# EAGLE board PCB (EAGLE 9.7.0)

Size 181.59 x 115.24 mm. Coordinates in mm from the lower left corner, seen from the top.
Outline: 1.27,0 181.59,0 180.32,115.24 0,115.24 1.27,0
Copper layers (1*16): Top / Bottom
Stack-up Default Layer Stack: Top User Defined 0.035mm / Dielectric-1 User Defined 1.5mm / Bottom User Defined 0.035mm
Design rules "default": minimum track width 6mil, minimum drill 0.35mm, track to track 6mil, track to pad 6mil, pad to pad 6mil, via to via 6mil, smd to smd 6mil, copper to edge 40mil, drill to drill 6mil, minimum pad ring 10mil, minimum via ring 8mil, stop-mask expansion 4mil, vias tented up to drill 0mil, thermal gap 10mil

## Footprints (pad centres in the part's own frame; a part is rotated, then mirrored left to right if it is on the bottom)
CAPRD550W60D1025H1250B = drill 0.8 pad 1.4: 1 -2.75,0; 2 2.75,0
DIOM5336X265N = smd 2.284 x 2.124: 1 -2.164,0; 2 2.164,0
HDRV5W99P0X254_1X5_1255X635X10 = drill 1.2 pad 1.8 square: 1 0,0 | drill 1.2 pad 1.8: 2 2.54,0; 3 5.08,0; 4 7.62,0; 5 10.16,0
HDRV20W63P0X254_1X20_5080X369X = drill 1.1 pad 1.65 square: 1 0,0 | drill 1.1 pad 1.65: 2 2.54,0; 3 5.08,0; 4 7.62,0; 5 10.16,0; 6 12.7,0; 7 15.24,0; 8 17.78,0; 9 20.32,0; 10 22.86,0; 11 25.4,0; 12 27.94,0; 13 30.48,0; 14 33.02,0; 15 35.56,0; 16 38.1,0; 17 40.64,0; 18 43.18,0; 19 45.72,0; 20 48.26,0
1X01 = drill 1.016 octagon: 1 0,0
RESAD724W46L381D178B = drill 0.66 pad 1.26: 1 -3.62,0; 2 3.62,0
PWP14_2P31X2P46-L = smd 1.168 x 0.305: 1 -2.87,1.95; 2 -2.87,1.3; 3 -2.87,0.65; 4 -2.87,0; 5 -2.87,-0.65; 6 -2.87,-1.3; 7 -2.87,-1.95; 8 2.87,-1.95; 9 2.87,-1.3; 10 2.87,-0.65; 11 2.87,0; 12 2.87,0.65; 13 2.87,1.3; 14 2.87,1.95 | smd 2.31 x 2.46: 15 0,0
N0016A = drill 0.9 pad 1.5 square: 1 -3.81,8.89 | drill 0.9 pad 1.5: 2 -3.81,6.35; 3 -3.81,3.81; 4 -3.81,1.27; 5 -3.81,-1.27; 6 -3.81,-3.81; 7 -3.81,-6.35; 8 -3.81,-8.89; 9 3.81,-8.89; 10 3.81,-6.35; 11 3.81,-3.81; 12 3.81,-1.27; 13 3.81,1.27; 14 3.81,3.81; 15 3.81,6.35; 16 3.81,8.89
P8 = drill 0.864 pad 1.372 square: 1 -7.62,7.62 | drill 0.864 pad 1.372: 2 -7.62,5.08; 3 -7.62,2.54; 4 -7.62,0; 5 0,0; 6 0,2.54; 7 0,5.08; 8 0,7.62
N16 = drill 0.787 pad 1.295 square: 1 -7.62,17.78 | drill 0.787 pad 1.295: 2 -7.62,15.24; 3 -7.62,12.7; 4 -7.62,10.16; 5 -7.62,7.62; 6 -7.62,5.08; 7 -7.62,2.54; 8 -7.62,0; 9 0,0; 10 0,2.54; 11 0,5.08; 12 0,7.62; 13 0,10.16; 14 0,12.7; 15 0,15.24; 16 0,17.78

## Placement (x,y rotation side)
C1  [CAPRD550W60D1025H1250B]  11.25,98.48 0 top
C2  [CAPRD550W60D1025H1250B]  105.54,100.33 0 top
C3  [CAPRD550W60D1025H1250B]  8.72,74.73 90 top
C4  [CAPRD550W60D1025H1250B]  39.37,72.39 0 top
C5  [CAPRD550W60D1025H1250B]  69.17,72.12 0 top
C6  [CAPRD550W60D1025H1250B]  171.07,73.14 90 top
C7  [CAPRD550W60D1025H1250B]  128.53,59.69 0 top
C8  [CAPRD550W60D1025H1250B]  128.53,40.64 0 top
C9  [CAPRD550W60D1025H1250B]  66.04,15.24 0 top
C10  [CAPRD550W60D1025H1250B]  64.77,36.83 0 top
D1  1SMB5920B  [DIOM5336X265N]  162.56,106.68 0 top
D2  1SMB5920B  [DIOM5336X265N]  162.96,111.76 0 top
D9  1SMB5920B  [DIOM5336X265N]  53.25,96.52 180 top
D10  1SMB5920B  [DIOM5336X265N]  53.34,87.63 180 top
D11  1SMB5920B  [DIOM5336X265N]  53.25,104.27 180 top
D12  1SMB5920B  [DIOM5336X265N]  53.34,110.92 180 top
D13  1SMB5920B  [DIOM5336X265N]  162.56,99.06 0 top
D14  1SMB5920B  [DIOM5336X265N]  162.56,91.44 0 top
J1  171856-0105  [HDRV5W99P0X254_1X5_1255X635X10]  22.24,104.14 0 top
J2  2-825433-0  [HDRV20W63P0X254_1X20_5080X369X]  150.86,75.63 270 top
J3  2-825433-0  [HDRV20W63P0X254_1X20_5080X369X]  157.94,27.94 90 top
JP1  PINHD-1X1  [1X01]  46.99,97.79 0 top
JP10  PINHD-1X1  [1X01]  46.99,105.41 0 top
JP12  PINHD-1X1  [1X01]  171.45,102.87 0 top
JP13  PINHD-1X1  [1X01]  46.99,93.98 0 top
JP14  PINHD-1X1  [1X01]  171.45,111.94 0 top
JP15  PINHD-1X1  [1X01]  171.45,96.52 0 top
JP17  PINHD-1X1  [1X01]  7.62,59.69 0 top
JP18  PINHD-1X1  [1X01]  158.75,81.28 0 top
JP20  PINHD-1X1  [1X01]  7.62,53.34 0 top
JP21  PINHD-1X1  [1X01]  8.89,38.1 0 top
JP22  PINHD-1X1  [1X01]  8.89,30.48 0 top
R1  [RESAD724W46L381D178B]  24.83,63.5 180 top
R2  [RESAD724W46L381D178B]  53.34,63.5 180 top
R76  120k  [RESAD724W46L381D178B]  60.96,97.79 0 top
R77  15k  [RESAD724W46L381D178B]  68.58,97.79 0 top
R79  120k  [RESAD724W46L381D178B]  60.96,105.41 0 top
R80  100k  [RESAD724W46L381D178B]  83.82,107.95 90 top
R81  15k  [RESAD724W46L381D178B]  76.2,110.49 0 top
R82  100k  [RESAD724W46L381D178B]  83.82,95.25 270 top
R83  15k  [RESAD724W46L381D178B]  76.2,92.71 0 top
R84  120k  [RESAD724W46L381D178B]  76.2,97.79 0 top
R85  120k  [RESAD724W46L381D178B]  76.2,105.41 0 top
R86  15k  [RESAD724W46L381D178B]  68.58,105.41 0 top
R90  120k  [RESAD724W46L381D178B]  153.43,104.19 0 top
R91  100k  [RESAD724W46L381D178B]  121.92,107.95 90 top
R92  15k  [RESAD724W46L381D178B]  132.08,111.76 0 top
R93  120k  [RESAD724W46L381D178B]  132.08,105.41 0 top
R94  15k  [RESAD724W46L381D178B]  143.51,104.19 0 top
R95  120k  [RESAD724W46L381D178B]  153.67,96.52 0 top
R96  100k  [RESAD724W46L381D178B]  123.19,92.71 270 top
R97  15k  [RESAD724W46L381D178B]  131.89,88.9 0 top
R98  120k  [RESAD724W46L381D178B]  132.08,96.52 0 top
R99  15k  [RESAD724W46L381D178B]  143.51,96.52 0 top
R100  15k  [RESAD724W46L381D178B]  111.76,73.66 0 top
R101  15k  [RESAD724W46L381D178B]  102.87,73.66 0 top
R102  [RESAD724W46L381D178B]  31.75,49.53 0 top
R103  [RESAD724W46L381D178B]  20.32,54.61 0 top
R104  [RESAD724W46L381D178B]  31.75,54.61 0 top
R105  [RESAD724W46L381D178B]  29.21,30.48 0 top
R106  [RESAD724W46L381D178B]  83.82,48.26 90 top
R107  [RESAD724W46L381D178B]  43.18,52.07 90 top
R108  [RESAD724W46L381D178B]  49.53,54.61 90 top
R109  [RESAD724W46L381D178B]  20.32,46.99 0 top
R110  [RESAD724W46L381D178B]  76.2,45.72 0 top
R111  [RESAD724W46L381D178B]  76.2,52.07 0 top
R112  [RESAD724W46L381D178B]  97.79,63.5 0 top
R113  [RESAD724W46L381D178B]  97.79,59.69 0 top
R114  [RESAD724W46L381D178B]  97.79,55.88 0 top
R115  [RESAD724W46L381D178B]  97.79,52.07 0 top
R116  [RESAD724W46L381D178B]  97.79,48.26 0 top
R117  [RESAD724W46L381D178B]  97.79,44.45 0 top
R118  [RESAD724W46L381D178B]  97.79,40.64 0 top
R119  [RESAD724W46L381D178B]  97.79,36.83 0 top
R120  [RESAD724W46L381D178B]  38.1,30.48 0 top
R121  [RESAD724W46L381D178B]  29.21,36.83 0 top
R122  [RESAD724W46L381D178B]  38.1,36.83 0 top
R123  [RESAD724W46L381D178B]  85.09,26.67 90 top
R124  [RESAD724W46L381D178B]  45.48,34.29 90 top
R125  [RESAD724W46L381D178B]  49.53,34.29 90 top
R126  [RESAD724W46L381D178B]  76.2,24.13 0 top
R127  [RESAD724W46L381D178B]  76.2,29.21 0 top
R128  [RESAD724W46L381D178B]  97.79,33.02 0 top
R129  [RESAD724W46L381D178B]  97.79,29.21 0 top
R130  [RESAD724W46L381D178B]  97.79,25.4 0 top
R131  [RESAD724W46L381D178B]  97.79,21.59 0 top
R132  [RESAD724W46L381D178B]  97.79,17.78 0 top
R133  [RESAD724W46L381D178B]  97.79,13.97 0 top
R134  [RESAD724W46L381D178B]  97.79,10.16 0 top
R135  [RESAD724W46L381D178B]  97.79,6.35 0 top
U1  TLV2474CPWPPWP14_2P31X2P46-L  [PWP14_2P31X2P46-L]  105.41,87.63 0 top
U2  CD4053BEN0016A  [N0016A]  83.82,72.39 0 top
U15  INA128PP8  [P8]  49.53,74.94 180 top
U17  TL071CPP8  [P8]  36.5,102.87 180 top
U19  TLV2474CPWPPWP14_2P31X2P46-L  [PWP14_2P31X2P46-L]  64.77,48.26 0 top
U20  TLV2474CPWPPWP14_2P31X2P46-L  [PWP14_2P31X2P46-L]  66.04,26.67 0 top
U21  CD74HC4051EN16  [N16]  117.17,40.64 0 top
U22  CD74HC4051EN16  [N16]  118.11,13.97 0 top
U23  INA128PP8  [P8]  21.06,81.28 180 top

## Library data of the parts
C1-C10 = Capacitor; CATEGORY: Capacitor
D1 D2 D9-D14 = Diode; CATEGORY: Diode; DESCRIPTION: DIODE ZENER 6.2V 3W SMB; MANUFACTURER: Diodes Incorporated; MPN: 1SMB5920B-13; SUB-CATEGORY: Zener; THERMALLOSS: 3W
J1 = pin5; DESCRIPTION: KK RPC .100 HEADER ASSEMBLY FRICTION LOCK SOLID BODY.; HEIGHT: 10.66mm; MANUFACTURER_NAME: Molex; MANUFACTURER_PART_NUMBER: 171856-0105; MOUSER_PART_NUMBER: 538-171856-0105; MOUSER_PRICE-STOCK: https://www.mouser.co.uk/ProductDetail/Molex/171856-0105?qs=EU6FO9ffTwd%2F6iYgCbhDyg%3D%3D
J2 J3 = pin20; DESCRIPTION: Headers & Wire Housings 20P HEADER 6.70mm 2.54mm CENTERLINE; HEIGHT: 9.7mm; MANUFACTURER_NAME: TE Connectivity; MANUFACTURER_PART_NUMBER: 2-825433-0; MOUSER_PART_NUMBER: 571-2-825433-0; MOUSER_PRICE-STOCK: https://www.mouser.co.uk/ProductDetail/TE-Connectivity/2-825433-0?qs=Yxch5oR%2FTsPyWO6AE6CpEQ%3D%3D
JP1 JP10 JP12-JP15 JP17 JP18 JP20-JP22 = Connector; CATEGORY: CONNECTOR; SUB-CATEGORY: PIN-HEADER
R1 R2 R76 R77 R79-R86 R90-R135 = Resistor; CATEGORY: Resistor; SUB-CATEGORY: Fixed
U1 U19 U20 = TLV2474CPWP; COPYRIGHT: Copyright (C) 2023 Ultra Librarian. All rights reserved.; MANUFACTURER_PART_NUMBER: TLV2474CPWP; MFR_NAME: Texas Instruments
U2 = cd4053; COPYRIGHT: Copyright (C) 2023 Ultra Librarian. All rights reserved.; MANUFACTURER_PART_NUMBER: CD4053BE; MFR_NAME: Texas Instruments; REFDES: RefDes; TYPE: TYPE
U15 U23 = INA128P; COPYRIGHT: Copyright (C) 2023 Ultra Librarian. All rights reserved.; MANUFACTURER_PART_NUMBER: INA128P; MFR_NAME: Texas Instruments
U17 = tl071; COPYRIGHT: Copyright (C) 2023 Ultra Librarian. All rights reserved.; MANUFACTURER_PART_NUMBER: TL071CP; MFR_NAME: Texas Instruments
U21 U22 = analogmux8_1; COPYRIGHT: Copyright (C) 2023 Ultra Librarian. All rights reserved.; MANUFACTURER_PART_NUMBER: CD74HC4051E; MFR_NAME: Texas Instruments

## Nets
ADC0: J3.11 U15.6
ADC1: J3.12 U19.14 U21.3
ADC2: J3.14
GND: C1.2 C2.2 C3.2 C4.2 C5.2 C6.2 C7.2 C8.2 C9.2 C10.2 D2.2 D10.2 D12.2 D14.2 J1.5 JP13.1 JP14.1 JP18.1 R81.2 R83.2 R84.2 R85.2 R92.2 R93.2 R97.2 R98.2 R101.2 R111.2 R127.2 U1.11 U2.7 U15.4 U15.5 U17.4 U19.11 U19.12 U20.11 U20.12 U21.7 U21.8 U22.7 U22.8 U23.4 U23.5
N$1: R2.1 U15.1
N$2: R1.1 U23.1
N$3: R1.2 U23.8
N$4: D1.1 D2.1
N$5: R2.2 U15.8
N$6: U2.12
N$7: U2.13
N$8: R90.2 R94.1 U1.12
N$9: U2.14
N$10: C5.1 U2.16
N$11: U2.11
N$12: U2.6
N$13: U2.8
N$60: D11.1 D12.1
N$116: D9.1 D10.1
N$117: R76.2 R77.1 U1.5
N$118: R79.2 R86.1 U1.3
N$119: R91.1 R93.1 U1.13
N$120: D13.1 D14.1
N$121: R82.1 R84.1 U1.6
N$122: R95.2 R99.1 U1.10
N$123: R80.1 R85.1 U1.2
N$131: R96.1 R98.1 U1.9
N$132: R100.2 R101.1 U17.2
N$134: JP20.1 R108.1 U19.5
N$151: JP17.1 R107.2 U19.3
N$152: R106.1 R110.2 U19.8
N$153: R106.2 R112.1 R113.1 R114.1 R115.1 R116.1 R117.1 R118.1 R119.1 U19.13
N$154: R113.2 U21.14
N$155: R109.1 R111.1 U19.10
N$156: R103.2 R104.1 R108.2 U19.1
N$157: R102.2 R104.2 U19.2 U19.6
N$159: R114.2 U21.15
N$160: R102.1 R107.1 R109.2 U19.7
N$161: R103.1 R110.1 U19.9
N$162: R115.2 U21.1
N$163: R116.2 U21.2
N$164: R117.2 U21.4
N$165: R118.2 U21.5
N$166: R119.2 U21.12
N$167: R123.1 R126.2 U20.8
N$168: R112.2 U21.13
N$169: R123.2 R128.1 R129.1 R130.1 R131.1 R132.1 R133.1 R134.1 R135.1 U20.13
N$170: JP22.1 R125.1 U20.5
N$171: JP21.1 R124.2 U20.3
N$172: R105.1 R127.1 U20.10
N$173: R121.2 R122.1 R125.2 U20.1
N$174: R120.2 R122.2 U20.2 U20.6
N$176: R105.2 R120.1 R124.1 U20.7
N$177: R121.1 R126.1 U20.9
N$178: R129.2 U22.14
N$179: R130.2 U22.15
N$180: R131.2 U22.1
N$181: R132.2 U22.2
N$182: R133.2 U22.4
N$183: R134.2 U22.5
N$184: R135.2 U22.12
N$185: R128.2 U22.13
OP1: R80.2 R81.1 U1.1 U15.3
OP2: R82.2 R83.1 U1.7 U15.2
OP3: R91.2 R92.1 U1.14 U23.3
OP4: R96.2 R97.1 U1.8 U23.2
OUT_I2: U20.14 U22.3
OUT_V2: U23.6
PIN4: J2.3
PIN5: J2.4
PIN14: J2.13 U21.11
PIN15: J2.14 U21.10
PIN16: J2.15 U21.9
PIN17: J2.16 U21.6
PIN19: J2.18 U22.11
PIN20: J2.19 U22.10
PIN21: J3.1 U22.9
PIN22: J3.2 U22.6
PIN24: J3.4
PIN25: J3.5
V+1: D9.2 JP1.1 R76.1
V+2: D1.2 JP12.1 R90.1
V+3: D11.2 JP10.1 R79.1
V+4: D13.2 JP15.1 R95.1
VDD: C1.1 C2.1 C3.1 C4.1 C6.1 C7.1 C8.1 C9.1 C10.1 J1.2 J3.20 R100.1 U1.4 U15.7 U17.7 U19.4 U20.4 U21.16 U22.16 U23.7
VREF: R77.2 R86.2 R94.2 R99.2 U17.3 U17.6

## Tracks (layer width: path | path; a pad name or v marks a point on that pad's centre or on a via)
ADC0  (1 unrouted)
ADC1  (2 unrouted)
GND  (43 unrouted)
N$1  (1 unrouted)
N$2  (1 unrouted)
N$3  (1 unrouted)
N$4  (1 unrouted)
N$5  (1 unrouted)
N$8  (2 unrouted)
N$10  (1 unrouted)
N$60  (1 unrouted)
N$116  (1 unrouted)
N$117  (2 unrouted)
N$118  (2 unrouted)
N$119  (2 unrouted)
N$120  (1 unrouted)
N$121  (2 unrouted)
N$122  (2 unrouted)
N$123  (2 unrouted)
N$131  (2 unrouted)
N$132  (2 unrouted)
N$134  (2 unrouted)
N$151  (2 unrouted)
N$152  (2 unrouted)
N$153  (9 unrouted)
N$154  (1 unrouted)
N$155  (2 unrouted)
N$156  (3 unrouted)
N$157  (3 unrouted)
N$159  (1 unrouted)
N$160  (3 unrouted)
N$161  (2 unrouted)
N$162  (1 unrouted)
N$163  (1 unrouted)
N$164  (1 unrouted)
N$165  (1 unrouted)
N$166  (1 unrouted)
N$167  (2 unrouted)
N$168  (1 unrouted)
N$169  (9 unrouted)
N$170  (2 unrouted)
N$171  (2 unrouted)
N$172  (2 unrouted)
N$173  (3 unrouted)
N$174  (3 unrouted)
N$176  (3 unrouted)
N$177  (2 unrouted)
N$178  (1 unrouted)
N$179  (1 unrouted)
N$180  (1 unrouted)
N$181  (1 unrouted)
N$182  (1 unrouted)
N$183  (1 unrouted)
N$184  (1 unrouted)
N$185  (1 unrouted)
OP1  (3 unrouted)
OP2  (3 unrouted)
OP3  (3 unrouted)
OP4  (3 unrouted)
OUT_I2  (1 unrouted)
PIN14  (1 unrouted)
PIN15  (1 unrouted)
PIN16  (1 unrouted)
PIN17  (1 unrouted)
PIN19  (1 unrouted)
PIN20  (1 unrouted)
PIN21  (1 unrouted)
PIN22  (1 unrouted)
V+1  (2 unrouted)
V+2  (2 unrouted)
V+3  (2 unrouted)
V+4  (2 unrouted)
VDD  (19 unrouted)
VREF  (5 unrouted)